# Altium PCB PCB1.PcbDoc
Units mm, origin at the board's own origin, x right, y up, seen from the top; angles counter-clockwise.
Board outline 137.29 x 81.91 mm, 2 copper layers (Top Layer, Bottom Layer); 27 components, 18 nets, 59 pads, 4 vias.
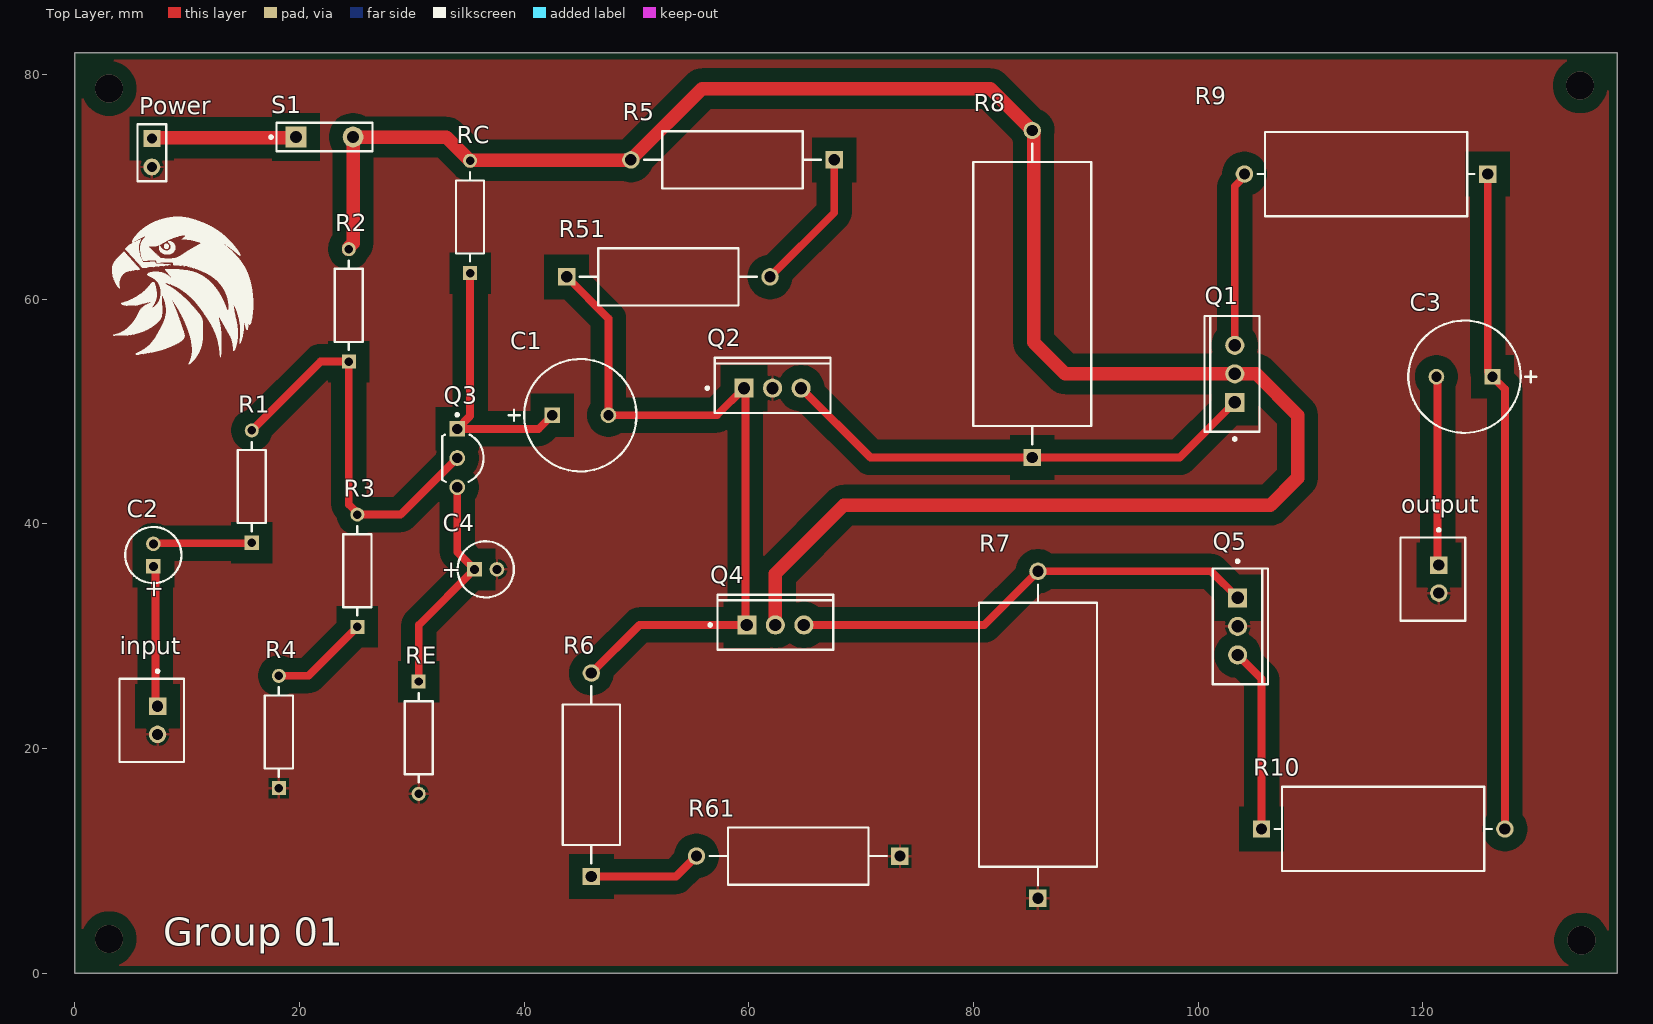
[diagram p0: Top Layer view]
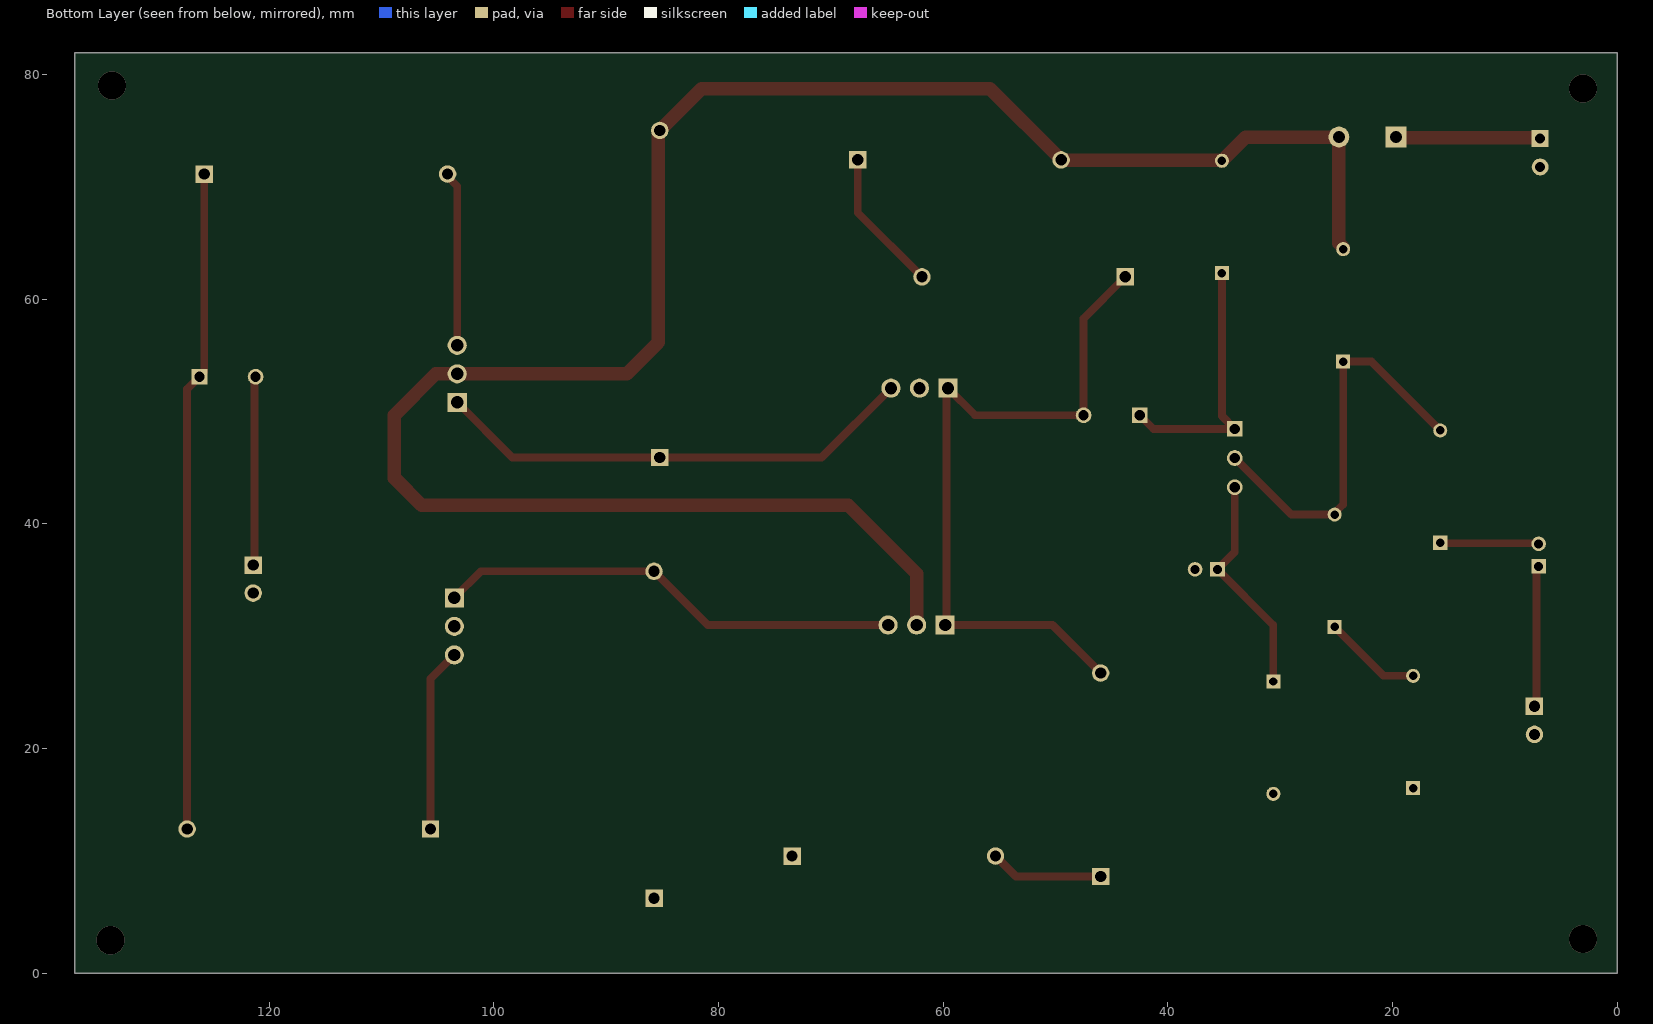
[diagram p1: Bottom Layer view, seen from below]
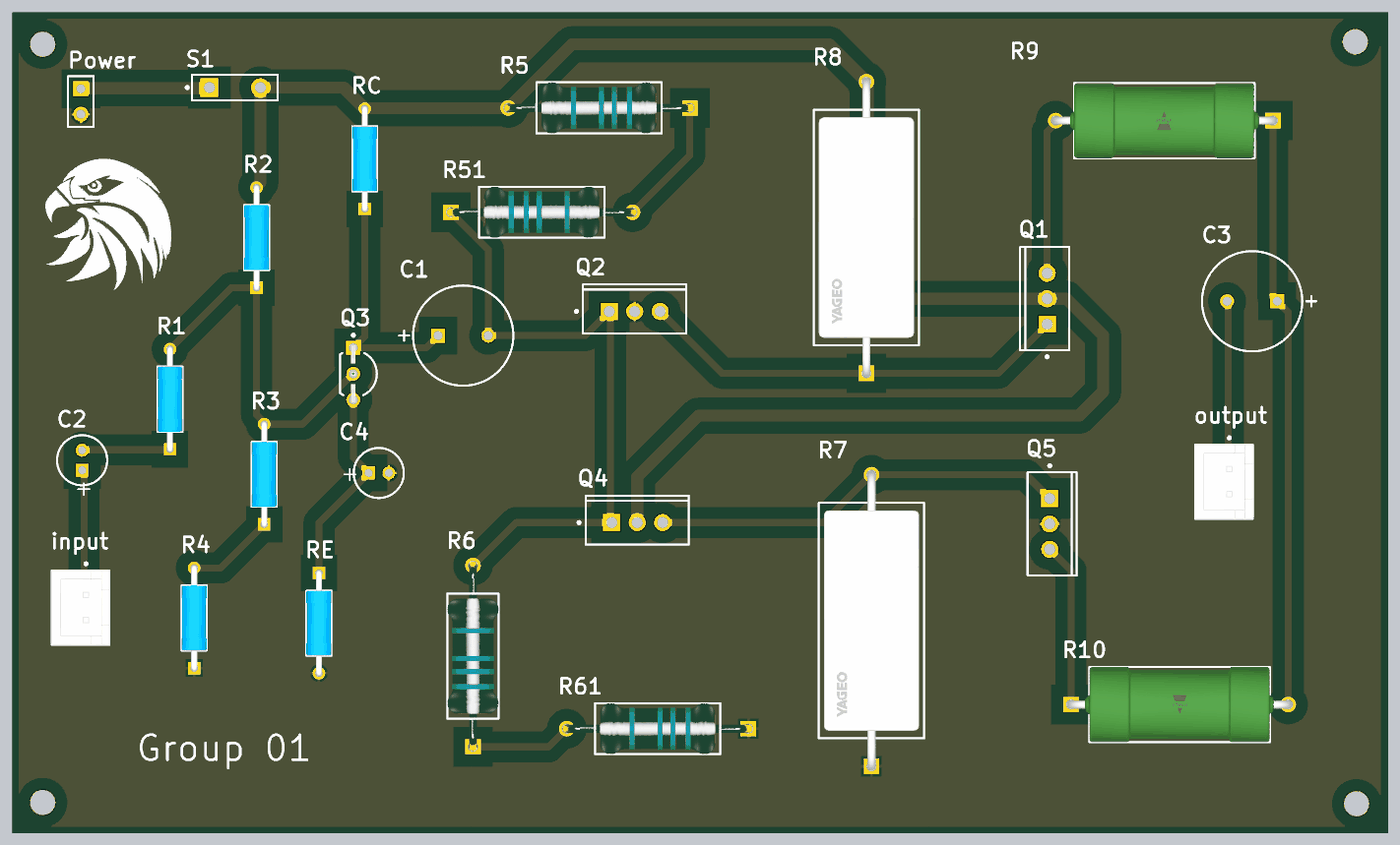
[diagram p2: 3D render of the assembled board from above, using the file's embedded part models]

## Layer stack, top to bottom
Top Solder: solder mask 0.0102, Solder Resist, Dk 3.5
Top Layer: signal copper 0.0356
Dielectric 1: dielectric 0.32, FR-4, Dk 4.8
Bottom Layer: signal copper 0.0356
Bottom Solder: solder mask 0.0102, Solder Resist, Dk 3.5

## Board outline
0,0 137.287,0 137.287,81.915 0,81.915

## Design rules (kind name [scope] priority, off if disabled: settings)
Clearance [All] p1: gap=0.5 ignorepadtopadclearanceinfootprint=FALSE
PolygonConnect [All] p1: connectstyle=Relief reliefconductorwidth=0.254 reliefentries=4 polygonreliefangle="90 Angle" airgapwidth=0.254
RoutingVias [All] p1: holewidth=0.711 width=1.27 viastyle="Through Hole" minholewidth=0.711 minwidth=1.27 maxholewidth=0.711 maxwidth=1.27
SolderMaskExpansion [All] p1: expansion=0.102 istentingtop=FALSE
Width [All] p1: maxlimit=1.2 minlimit=0.7 preferedwidth=0.7 minimp=50.000000 maximp=50.000000 favimp=50.000000
30 further rules are at their usual default settings.

## Components (designator, comment, footprint, x,y, rotation, side; value= is the part's Value field where it differs from the comment)
C1 "1mF" PNSC-EEU-EE2G100-2_V 44.998,49.657 r0 top
C2 "4.7μF" CAPPR55-200-1100X500X1200 6.985,37.211 r90 top
C3 "1mF" PNSC-EEU-EE2G100-2_V 123.698,53.086 r180 top
C4 "470μF" CAPPR55-200-1100X500X1200 36.576,35.941 r0 top
input "B2B-XH-A(LF)(SN)" FP-B2B-XH-A_LF_SN-MFG 6.841,22.499 r270 top
output "B2B-XH-A(LF)(SN)" FP-B2B-XH-A_LF_SN-MFG 120.887,35.072 r270 top
Power "Header 2" HDR1X2 6.858,74.295 r270 top
Q1 "TIP31CG" ONSC-TO-220-3-221A-09 103.251,53.34 r180 top
Q2 "TIP32CG" ONSC-TO-220-3-221A-09 62.103,52.07 r90 top
Q3 "BC547BRL1G" ONSC-TO-92-3-29-11_AM_BL 34.036,45.847 r270 top
Q4 "TIP31CG" ONSC-TO-220-3-221A-09 62.357,30.988 r90 top
Q5 "TIP32CG" ONSC-TO-220-3-221A-09 103.505,30.861 r0 top
R1 "56Ω" FP-MRS25-MFG 15.748,43.307 r90 top value=1.1kΩ
R2 "10kΩ" FP-MRS25-MFG 24.384,59.436 r90 top value=1.1kΩ
R3 "1kΩ" FP-MRS25-MFG 25.146,35.814 r90 top value=1.1kΩ
R4 "1.8kΩ" FP-MRS25-MFG 18.161,21.463 r90 top value=1.1kΩ
R5 "KNP100JR-73-22R" FP-KNP100-MFG 58.547,72.39 r180 top value=22Ω
R6 "KNP100JR-73-22R" FP-KNP100-MFG 45.974,17.653 r90 top value=22Ω
R7 "68Ω-5W" FP-SQP500-MFG 85.725,21.209 r90 top value=1.2Ω
R8 "83Ω-5W" FP-SQP500-MFG 85.217,60.452 r90 top value=1.2Ω
R9 "AC05000003909JAC00" FP-AC05000003909JAC00-0 114.935,71.12 r180 top value=39Ω
R10 "AC05000003909JAC00" FP-AC05000003909JAC00-0 116.459,12.827 r0 top value=39Ω
R51 "KNP100JR-73-22R" FP-KNP100-MFG 52.832,61.976 r0 top value=22Ω
R61 "KNP100JR-73-22R" FP-KNP100-MFG 64.389,10.414 r180 top value=22Ω
RC "193Ω" FP-MRS25-MFG 35.179,67.31 r90 top value=1.1kΩ
RE "75Ω" FP-MRS25-MFG 30.607,20.955 r270 top value=1.1kΩ
S1 "SW-SPST" SPST-2 22.225,74.422 r0 top

## Footprints (in the part's own frame and the unit in brackets; to place one, negate y for a bottom-side part, rotate by r counter-clockwise, add the part's x,y. Pads: shape width x height; smd on the part's side, far side on the other; paste and mask are expansions set on the pad)
CAPPR55-200-1100X500X1200 [mm] "THD, 2-Leads, Dia 5mm, Body Length 11mm"
  rect 1.3x1.3 hole 0.8: 1(-1,0)
  round 1.3 hole 0.8: 2(1,0)
  silkscreen extent -2.5,-2.5 2.5,2.5, body extent -2.5,-2.5 2.5,2.5, height 12
FP-AC05000003909JAC00-0 [mm]
  rect 1.55x1.55 hole 1 paste-1000 mask+0: 1(-10.83,0)
  round 1.55 hole 1 paste-1000 mask+0: 2(10.83,0)
  silkscreen extent -9.65,-3.75 9.65,3.75, body extent -11.71,-3.85 11.71,3.85, height 0.25
FP-B2B-XH-A_LF_SN-MFG [mm]
  rect 1.55x1.55 hole 1 paste-1000 mask+0: 1(-1.25,0.525)
  round 1.55 hole 1 paste-1000 mask+0: 2(1.25,0.525)
  silkscreen extent -4.5,-2.88 3.7,2.88, body extent -3.8,-2.98 3.8,2.98, height 0.25
FP-KNP100-MFG [mm]
  rect 1.55x1.55 hole 1 paste-1000 mask+0: 1(-9.055,0)
  round 1.55 hole 1 paste-1000 mask+0: 2(9.055,0)
  silkscreen extent -7.88,-2.55 7.88,2.55, body extent -9.93,-2.65 9.93,2.65, height 0.25
FP-MRS25-MFG [mm]
  rect 1.25x1.25 hole 0.75 paste-1000 mask+0: 1(-5,0)
  round 1.25 hole 0.75 paste-1000 mask+0: 2(5,0)
  silkscreen extent -3.98,-1.25 3.98,1.25, body extent -5.72,-1.35 5.72,1.35, height 0.25
FP-SQP500-MFG [mm]
  rect 1.55x1.55 hole 1 paste-1000 mask+0: 1(-14.555,0)
  round 1.55 hole 1 paste-1000 mask+0: 2(14.555,0)
  silkscreen extent -13.38,-5.25 13.38,5.25, body extent -15.43,-5.35 15.43,5.35, height 0.25
HDR1X2 [mm] "Connector; Header; 2 Position"
  rect 1.5x1.5 hole 0.9: 1(0,0)
  round 1.5 hole 0.9: 2(2.54,0)
  silkscreen extent -1.27,-1.27 3.81,1.27
ONSC-TO-92-3-29-11_AM_BL [mm] "TO, 3-Leads, Body Dia 4.7mm, Pitch 2.6mm"
  rect 1.4x1.4 hole 0.9: 1(-2.6,0)
  round 1.4 hole 0.9: 2(0,0) 3(2.6,0)
  silkscreen extent -3.97,-1.34 2.13,2.35, body extent -2.84,-1.34 2.84,2.35, height 5.33
ONSC-TO-220-3-221A-09 [mm] "FM, 3-Leads, Body 10.3x4.85mm, Pitch 2.54mm"
  rect 1.7x1.7 hole 1.1: 1(0,2.54)
  round 1.7 hole 1.1: 2(0,0) 3(0,-2.54)
  silkscreen extent -2.2,-5.15 2.7,5.92, body extent -2.18,-5.15 2.67,5.15, height 19.85
PNSC-EEU-EE2G100-2_V [mm] "Through-hole, 2-Leads, Base 10x10mm, Height 22mm"
  rect 1.4x1.4 hole 0.9: 1(-2.5,0)
  round 1.4 hole 0.9: 2(2.5,0)
  silkscreen extent -6.4,-5 5,5, body extent -5,-5 5,5, height 22
SPST-2 [mm] "Switch; 2 Leads"
  rect 1.85x1.85 hole 1.1: 1(-2.54,0)
  round 1.85 hole 1.1: 2(2.54,0)
  silkscreen extent -4.89,-1.27 4.28,1.27

## Part data
C1 C3: library part CMP-0736-00002-1, "Aluminum Electrolytic Capacitor, 10 uF +/- 20%, 400 V, -25 to 105 degC, 2-Pin 10 x 10 x 22 mm Through-hole, RoHS, Tape and Reel", Capacitance Tolerance="+/- 20%", Manufacturer=Panasonic, PartNumber=EEU-EE2G100, Rated Voltage="400 V", Ripple Current="430 mA", Temp. Range="-25 to 105 degC", Cap.="10 uF", ComponentLink1Description="Manufacturer URL", ComponentLink1URL=http://industrial.panasonic.com/, ComponentLink2Description=Datasheet, ComponentLink2URL=http://industrial.panasonic.com/www-data/pdf/ABA0000/ABA0000CE113.pdf, ComponentLink3Description="Package Specification", ComponentLink3URL=http://industrial.panasonic.com/www-data/pdf/ABA0000/ABA0000PE245.pdf, DatasheetVersion=Nov-12, Mounting Technology="Through Hole", PackageDescription="2-Pin Through-hole, Base 10 x 10 mm, Height 22 mm", PackageReference=EEU-EE2G100-2, PackageVersion=Nov-12, Packing="Tape and Reel", RoHS=TRUE
C2: library part CMP-1665-00040-2, "Aluminum Electrolytic Capacitor, 2.2 uF, +/- 20%, 50 V, -40 to 85 degC, 2-Pin THD, RoHS, Bulk", Capacitance=2.2uF, Case/Package=Radial, Dielectric Material=Aluminium, Leakage Current=3uA, Manufacturer=Panasonic, Max Operating Temperature=85degC, Min Operating Temperature=-40degC, Package Description="2-Pin Radial Lead, Dia 5 mm, Height 12 mm", Package Quantity=200, Package Reference=CAPPR55-200-1100X500X1200, Ripple Current=20mA, Tolerance=20%, Voltage=50V, Contact Plating=Tin, Datasheet URL=https://industrial.panasonic.com/cdbs/www-data/pdf/RDF0000/ABA0000C1218.pdf, Datasheet Version="Rev. 05, 10/2016", Diameter=5mm, Dissipation Factor=0.12%, Height=11mm, Height - Seated (Max)=0.472inch, Lead Diameter=0.5mm, Lead Free=LeadFree, Lead Pitch=2mm, Lead/Base Style=Straight, Length=11mm, Life (Hours)=2000Hour, Manufacturer URL=http://www.panasonic.com/, Mount=ThroughHole, Number of Pins=2, Packaging=Bulk, Radiation Hardening=No, REACH SVHC=NoSVHC, RoHSCompliant=true, Termination=Radial, Voltage Rating=50V, Voltage Rating (DC)=50V
C4: library part CMP-1665-00036-2, "Aluminum Electrolytic Capacitor, 22 uF, +/- 20%, 50 V, -40 to 85 degC, 2-Pin THD, RoHS, Bulk", Capacitance=22uF, Case/Package=Radial, Leakage Current=3uA, Manufacturer=Panasonic, Max Operating Temperature=85degC, Min Operating Temperature=-40degC, Package Description="2-Pin Radial Lead, Dia 5 mm, Height 12 mm", Package Quantity=200, Package Reference=CAPPR55-200-1100X500X1200, Ripple Current=100mA, Tolerance=20%, Voltage=50V, Datasheet URL=https://industrial.panasonic.com/cdbs/www-data/pdf/RDF0000/ABA0000C1218.pdf, Datasheet Version="Rev. 05, 10/2016", Diameter=5mm, Dissipation Factor=0.12%, Height=11mm, Height - Seated (Max)=0.472inch, Lead Diameter=0.5mm, Lead Pitch=2mm, Lead/Base Style=Straight, Length=11mm, Life (Hours)=2000Hour, Manufacturer URL=http://www.panasonic.com/, Mount=ThroughHole, Packaging=Bulk, Radiation Hardening=No, REACH SVHC=NoSVHC, Ripple Current (AC)=100mA, RoHSCompliant=true, Termination=Radial, Voltage Rating=50V, Voltage Rating (DC)=50V
input output: library part CMP-2000-05888-3, "CONN HEADER VERT 2POS 2.5MM", Color=Natural, Contact Resistance=20mR, Current Rating=3A, Housing Color=White, Insulation Resistance=1GR, Max Operating Temperature=85°C, Max Voltage Rating (AC)=250V, Min Operating Temperature=-25°C, Connector Type="Male Pin", Contact Material=Brass, Contact Plating=Tin, Contact Type="Male Pin", Depth=5.75mm, Fastening Type=Detent, Housing Material=Polyamide, Lead Free="Lead Free", Lead Pitch=2.5mm, Length=7.4mm, Max Current Rating=3A, Max Voltage Rating (DC)=250V, Mount="Through Hole", Number Of Contacts=2, Number of Positions=2, Number Of Rows=1, Orientation=Straight, Packaging=Bulk, Pitch=2.5mm, REACH SVHC="No SVHC", Series=XH, Termination=Solder, Voltage Rating=250V, Voltage Rating (AC)=250V, Wire/Cable Gauge=22AWG
Power: "Header, 2-Pin", LatestRevisionDate=17-Jul-2002, LatestRevisionNote="Re-released for DXP Platform.", Publisher="Altium Limited"
Q1 Q4: library part CMP-1048-01070-1, "Complementary Silicon Plastic Power Transistor, 3-Pin TO-220, Pb-Free, Tube", Manufacturer="On Semiconductor", ComponentLink1Description="Manufacturer URL", ComponentLink1URL=http://www.onsemi.com/, ComponentLink2Description=Datasheet, ComponentLink2URL=http://www.onsemi.com/pub_link/Collateral/TIP31A-D.PDF, ComponentLink3Description="Package Specification", ComponentLink3URL=http://www.onsemi.com/pub_link/Collateral/221A-09.PDF, DatasheetVersion="Rev. 14", fT Min (MHz)=3, IC Continuous (A)=3, Mounting Technology="Through Hole", PackageDescription="3-Pin Flange Mount, Vertical Straight Lead, Body 9.97 x 4.445 mm, Pitch 2.54 mm", PackageReference=TO-220-3-221A-09, PackageVersion="Rev. AG, 09/2011", Packing=Tube, PartNumber=TIP31CG, Polarity=NPN, RoHS=TRUE
Q2 Q5: library part CMP-1048-01068-1, "Complementary Silicon Plastic Power Transistor, 3-Pin TO-220, Pb-Free, Tube", Manufacturer="On Semiconductor", ComponentLink1Description="Manufacturer URL", ComponentLink1URL=http://www.onsemi.com/, ComponentLink2Description=Datasheet, ComponentLink2URL=http://www.onsemi.com/pub_link/Collateral/TIP31A-D.PDF, ComponentLink3Description="Package Specification", ComponentLink3URL=http://www.onsemi.com/pub_link/Collateral/221A-09.PDF, DatasheetVersion="Rev. 14", fT Min (MHz)=3, IC Continuous (A)=3, Mounting Technology="Through Hole", PackageDescription="3-Pin Flange Mount, Vertical Straight Lead, Body 9.97 x 4.445 mm, Pitch 2.54 mm", PackageReference=TO-220-3-221A-09, PackageVersion="Rev. AG, 09/2011", Packing=Tube, PartNumber=TIP32CG, Polarity=PNP, RoHS=TRUE
Q3: library part CMP-1048-01605-1, "Amplifier Transistor, NPN Silicon, 3-Pin TO-92, Pb-Free, Tape and Reel", Manufacturer="On Semiconductor", ComponentLink1Description="Manufacturer URL", ComponentLink1URL=http://www.onsemi.com/, ComponentLink2Description=Datasheet, ComponentLink2URL=http://www.onsemi.com/pub_link/Collateral/BC546-D.PDF, ComponentLink3Description="Package Specification", ComponentLink3URL=http://www.onsemi.com/pub_link/Collateral/MAC97-D.PDF, DatasheetVersion="Rev. 7", fT Min (MHz)=150, IC Continuous (A)=0.1, Mounting Technology="Through Hole", PackageDescription="3-Pin Transistor Outline, Body 4.825 x 3.685 mm, Pitch 1.27 mm", PackageReference=TO-92-3-29-11_AM_BL, PackageVersion="Rev. AM", Packing="Tape and Reel", PartNumber=BC547BRL1G, Polarity=NPN, RoHS=TRUE
R1 R2 R3 R4 RC RE: library part CMP-02408-000003-1, "RES 1.1K OHM 0.6W 1% AXIAL", Manufacturer="Vishay BC Components", Manufacturer Part Number=MRS25000C1101FCT00, Package=MRS25, Power Rating=0.6W, Resistance=1.1kΩ, Temperature="-55°C to +155°C", Temperature Coefficient=50ppm/°C, Temperature Range High=+155°C, Temperature Range Low=-55°C, Tolerance=1%, Voltage Rating=350V, Automotive=No, Category=Res, ComponentLink2Description=Datasheet, ComponentLink2URL=http://www.vishay.com/docs/28724/mrs16m25.pdf, Composition="Thin Film", Device Class L1="Passive Components", Device Class L2=Resistors, Device Class L3="Through-Hole Resistors", Digikey Description="RES 1.1K OHM 0.6W 1% AXIAL", Height=2.5mm, Ipc Land Pattern Name=RESAD1000W75L650D250, Lead Free=Yes, Mouser Description="Thin Film Resistors .6watt 1.1Kohms 1%", Octopart=https://octopart.com/mrs25000c1101fct00-vishay-43740214, RoHS=TRUE, Series=MRS25
R5 R6 R51 R61: library part CMP-03413-000004-1, "RES 22 OHM 1W 5% AXIAL", Manufacturer=Yageo, Package=KNP100, Power Rating=1W, Resistance=22Ω, Temperature="-40°C to +200°C", Temperature Coefficient=300ppm/°C, Temperature Range High=+200°C, Temperature Range Low=-40°C, Tolerance=5%, Automotive=No, Category=Res, ComponentLink2Description=Datasheet, ComponentLink2URL=https://www.yageo.com/upload/media/product/products/datasheet/lr/Yageo_LR_KNP_1.pdf, Composition=Wirewound, Device Class L1="Passive Components", Device Class L2=Resistors, Device Class L3="Through-Hole Resistors", Digikey Description="RES 22 OHM 1W 5% AXIAL", Height=5.1mm, Ipc Land Pattern Name=RESAD1811W100L1250D510, Lead Free=Yes, Manufacturer Part Number=KNP100JR-73-22R, Mouser Description="Wirewound Resistors 22ohm 1W 5%", Octopart=https://octopart.com/knp100jr-73-22r-yageo-19031610, RoHS=TRUE, Series=KNP
R7 R8: library part CMP-03413-000003-1, "RES 1.2 OHM 5W 5% AXIAL", Manufacturer=Yageo, Manufacturer Part Number=SQP500JB-1R2, Package=SQP500, Power Rating=5W, Resistance=1.2Ω, Temperature="-55°C to +155°C", Temperature Coefficient=300ppm/°C, Temperature Range High=+155°C, Temperature Range Low=-55°C, Tolerance=5%, Voltage Rating=350V, Automotive=No, Category=Res, ComponentLink2Description=Datasheet, ComponentLink2URL=https://datasheet.ciiva.com/2723/yageolr-sqpnsp-2013-2723111.pdf, Composition=Wirewound, Device Class L1="Passive Components", Device Class L2=Resistors, Device Class L3="Through-Hole Resistors", Digikey Description="RES 1.2 OHM 5W 5% AXIAL", Height=10mm, Ipc Land Pattern Name=RESAD2911W100L2350D1050, Lead Free=Yes, Octopart=https://octopart.com/sqp500jb-1r2-yageo-1162571, RoHS=TRUE, Series=SQP
R9 R10: library part CMP-02408-000001-1, "RES 39 OHM 5W 5% AXIAL", Manufacturer=Vishay, Package=0, Power Rating=5W, Resistance=39Ω, Temperature="-55°C to +250°C", Temperature Range High=+250°C, Temperature Range Low=-55°C, Tolerance=5%, Automotive=No, Automotive Grade=NA, Category=Res, ComponentLink2Description=Datasheet, ComponentLink2URL=http://www.vishay.com/docs/28730/acac-at.pdf, Composition=Wirewound, Device Class L1="Passive Components", Device Class L2=Resistors, Device Class L3="Through-Hole Resistors", Digikey Description="RES 39 OHM 5W 5% AXIAL", Height=7.5mm, Ipc Land Pattern Name=RESAD2166W100L1800D750, Lead Free=Yes, Manufacturer Part Number=AC05000003909JAC00, Mouser Description="Res Wirewound 39 Ohm 5% 5W -80ppm/°C to -10ppm/°C Conformal AXL Thru-Hole Ammo Pack", Octopart=https://octopart.com/ac05000003909jac00-vishay-39746279, RoHS=TRUE, Series=AC
S1: "Single-Pole, Single-Throw Switch", LatestRevisionDate=17-Jul-2002, LatestRevisionNote="Re-released for DXP Platform.", PackageDescription="Switch; 2 Leads", PackageReference=SPST-2, Published=24-Mar-1999, Publisher="Altium Limited"

## Via types
v1: diameter 2.5, hole 2.5, Top Layer to Bottom Layer, 4 vias

## Nets (pads, with @x,y where several pads share a name; then routed paths per layer and width w, separated by ;. In a path a pad name is that pad's centre, name@x,y a point inside that pad or via, vN(x,y) a via of type N, cw(c..) or ccw(c..) an arc to the next point about the centre after c; other vN are vias at no path point)
+12: Q1.2 Q4.2 R2.2 R5.2 R8.2 RC.2 S1.2 | length 181
  Top Layer w0.7: RC.2 RC.2@35.219,72.35 ; R5.2@49.452,72.35 R5.2
  Top Layer w1.2: R2.2 24.384,64.585 24.765,64.966 S1.2 33.067,74.422 RC.2 ; RC.2@35.219,72.35 R5.2@49.452,72.35 ; R5.2 55.842,78.74 81.484,78.74 R8.2 85.344,74.88 85.344,56.134 88.138,53.34 Q1.2 105.156,53.34 108.839,49.657 108.839,44.069 106.426,41.656 68.453,41.656 62.357,35.56 Q4.2
GND: C4.2 input.2 output.2 Power.2 Q2.2 Q5.2 R4.1 R7.1 R61.1 RE.2
NetC1_1: C1.1 Q3.1 RC.1 | length 23.3
  Top Layer w0.7: RC.1 35.179,49.59 Q3.1 41.288,48.447 C1.1
NetC1_2: C1.2 Q2.1 Q4.1 R6.2 R51.1 | length 63.7
  Top Layer w0.7: R51.1 47.498,58.255 C1.2 57.15,49.657 Q2.1 59.69,51.943 59.69,31.115 Q4.1 50.254,30.988 R6.2
NetC2_1: C2.1 input.1 | length 12.6
  Top Layer w0.7: C2.1 7.175,36.021 7.175,23.939 input.1
NetC2_2: C2.2 R1.1 | length 8.8
  Top Layer w0.7: C2.2 7.033,38.259 15.7,38.259 R1.1
NetC3_1: C3.1 R9.1 R10.2 | length 58.9
  Top Layer w0.7: R9.1 125.765,53.519 C3.1 127.289,51.995 R10.2
NetC3_2: C3.2 output.1 | length 16.9
  Top Layer w0.7: C3.2 121.305,52.979 121.305,36.429 output.1
NetC4_1: C4.1 Q3.3 RE.1 | length 20
  Top Layer w0.7: RE.1 30.607,30.972 C4.1 34.036,37.481 Q3.3
NetPower_1: Power.1 S1.1 | length 12.9
  Top Layer w0.7: Power.1 Power.1@6.921,74.358 ; S1.1@19.621,74.358 S1.1
  Top Layer w1.2: Power.1@6.921,74.358 S1.1@19.621,74.358
NetQ1_1: Q1.1 Q2.3 R8.1 | length 43.2
  Top Layer w0.7: Q2.3 70.816,45.897 R8.1 98.348,45.897 Q1.1
NetQ1_3: Q1.3 R9.2 | length 15.6
  Top Layer w0.7: Q1.3 103.251,70.036 104.105,70.89 R9.2
NetQ3_2: Q3.2 R1.2 R2.1 R3.2 | length 36.1
  Top Layer w0.7: R1.2 21.877,54.436 R2.1 24.384,41.725 25.146,40.963 R3.2 29.003,40.814 Q3.2
NetQ4_3: Q4.3 Q5.1 R7.2 | length 41.6
  Top Layer w0.7: Q4.3 80.949,30.988 R7.2 101.142,35.764 Q5.1
NetQ5_3: Q5.3 R10.1 | length 16.4
  Top Layer w0.7: Q5.3 105.629,26.197 R10.1
NetR3_1: R3.1 R4.2 | length 8.8
  Top Layer w0.7: R4.2 20.795,26.463 R3.1
NetR5_1: R5.1 R51.2 | length 12.8
  Top Layer w0.7: R51.2 67.602,67.691 R5.1
NetR6_1: R6.1 R61.2 | length 10.1
  Top Layer w0.7: R6.1 53.518,8.598 R61.2
copper on no net:
  other v1: 134.112,2.921 3.048,3.048 3.048,78.74 133.985,78.994

## Polygon pours and split planes (outlines as drawn)
GND on Top Layer "GND_L01_P000" (solid, pour order 0): 0.635,0.635 136.525,0.635 136.525,81.28 0.889,81.28 0.635,81.026

## Silkscreen, mask and mechanical layers (free items; w line width, h text height)
Top Overlay:
  drawing of 6 lines, arcs and shapes, not listed
  text "Group 01" at 7.874,2.413 h2.5

## Text inside footprints (layer, text, board x,y; h text height)
C2: Top Overlay "+" at 7.722,33.303 h1.5 r90
C4: Top Overlay "+" at 32.668,35.204 h1.5